# Altium PCB GesturaPCBLayout.PcbDoc (part 2 of 2)
Units mm, origin at the board's own origin, x right, y up, seen from the top; angles counter-clockwise.
Board outline 48.9 x 57.02 mm, 4 copper layers (Top Layer, Ground 1, Ground 2, Bottom Layer), stack 0.603 mm thick; 77 components, 66 nets, 315 pads, 197 vias.
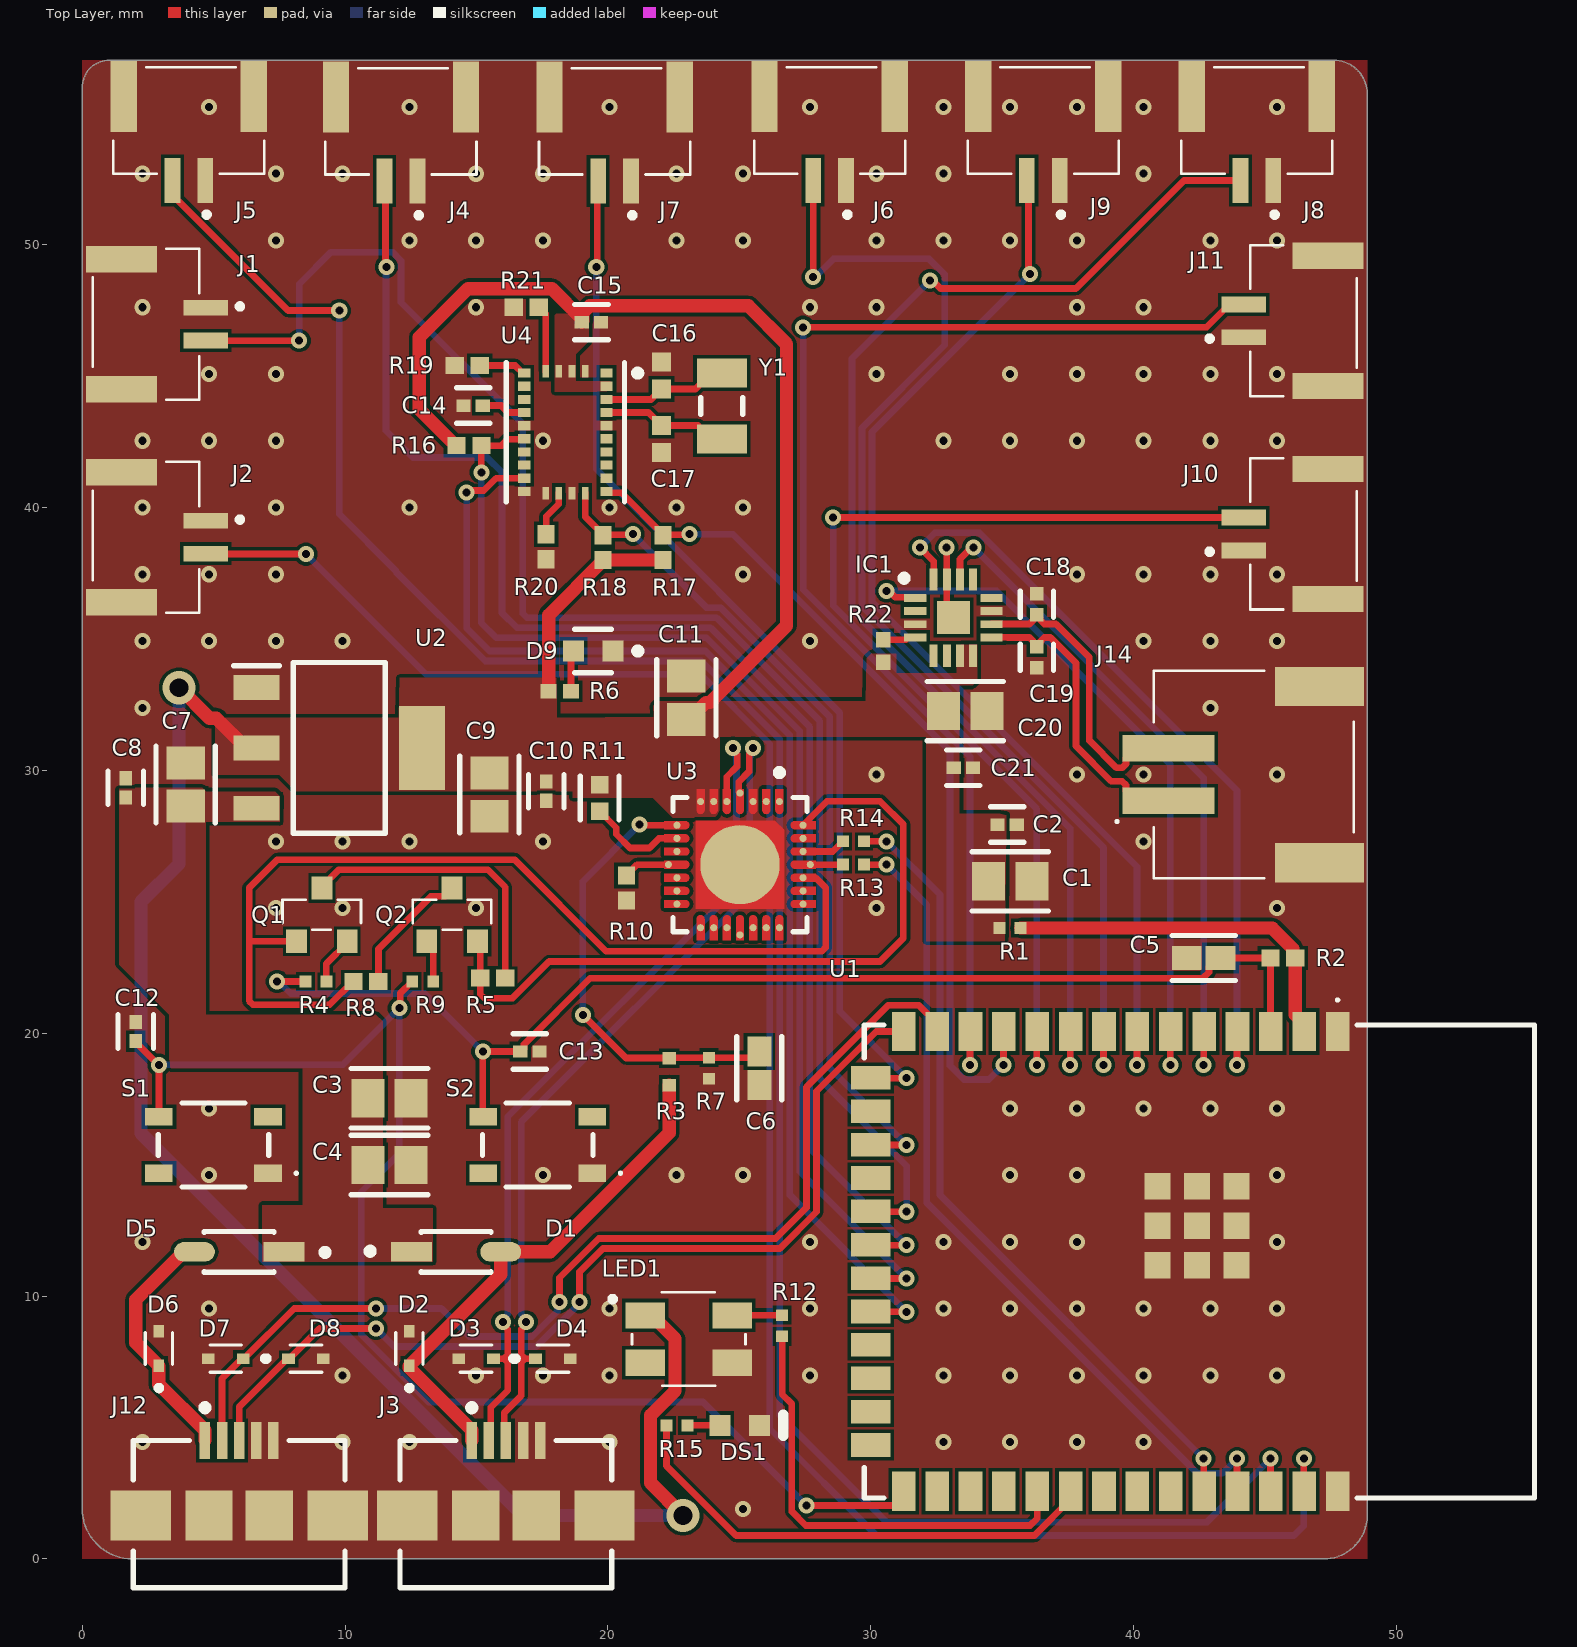
[diagram p0: Top Layer view]

## Via types
v1: diameter 0.61, hole 0.305, Top Layer to Bottom Layer, tented both sides, 195 vias
v2: diameter 1.27, hole 0.711, Top Layer to Bottom Layer, tented both sides, 2 vias

## Nets (pads, with @x,y where several pads share a name; then routed paths per layer and width w, separated by ;. In a path a pad name is that pad's centre, name@x,y a point inside that pad or via, vN(x,y) a via of type N, cw(c..) or ccw(c..) an arc to the next point about the centre after c; other vN are vias at no path point) (continued)
USB_P: (continued)
  Bottom Layer w0.254: v1(16.891,9.017) 16.891,9.113 16.7,9.304 16.7,16.617 25.4,25.317 25.4,30.534 25.459,30.593 25.459,30.793 v1(25.527,30.861)
VBUS: D1.2 D2.1 J3.1 R3.2 | length 19.7
  Top Layer w0.508: J3.1 14.822,4.893 12.446,7.269 D2.1 15.924,10.819 D1.2 17.805,11.684 22.333,16.212 R3.2
VBUSB: D5.2 D6.1 J12.1 | length 9.4
  Top Layer w0.508: D5.2 3.861,11.684 2.032,9.855 2.032,8.225 D6.1 2.916,6.646 4.669,4.893 J12.1
VCC_3V3: C1.1 C2.1 C9.1 C10.1 C11.1 C15.1 C20.1 C21.1 IC1.7 IC1.8 LED1.3 R1.1 R6.2 R11.1 R16.2 R17.2 R18.2 R22.2 U2.2 U2.4 U3.6 U3.7 U4.3 U4.4 U4.28 | length 102.5
  Top Layer w0.508: v2(3.683,33.147) 4.84,31.99 5.1,31.99 6.229,30.861 U2.2 ; R16.2 14.215,42.36 12.827,43.748 12.827,46.482 14.676,48.331 17.874,48.331 18.992,47.213 18.992,47.075 C15.1 19.007,47.061 19.05,47.104 19.05,47.413 19.313,47.676 25.349,47.676 26.797,46.228 26.797,35.508 23.873,32.583 23.731,32.583 23.088,31.94 C11.1 ; R6.2 17.744,35.913 19.812,37.981 R18.2 R17.2 ; LED1.3 21.676,9.262 22.557,8.381 22.557,6.395 21.624,5.463 21.624,2.887 v2(22.86,1.651)
  Bottom Layer w0.508: v2(3.683,33.147) 3.683,26.45 2.235,25.002 2.235,16.195 16.779,1.651 v2(22.86,1.651)
VCC_5V: C3.1 C4.1 C7.1 C8.1 D1.1 D5.1 U2.3
XIN32: C16.1 U4.27 Y1.1 | length 4.8
  Top Layer w0.254: U4.27 21.642,44.118 C16.1 23.334,44.517 23.935,45.118 Y1.1
XOUT32: C17.1 U4.26 Y1.2 | length 4.8
  Top Layer w0.254: U4.26 21.547,43.618 C17.1 23.429,43.124 23.935,42.618 Y1.2
pads on no net: IC1.2 IC1.5 IC1.6 IC1.12 IC1.13 LED1.4 S1.2 S1.3 S2.2 S2.3 U1.28 U1.29 U1.30 U3.1 U3.2 U3.10 U3.12 U3.13 U3.14 U3.15 U3.16 U3.17 U3.18 U3.19 U3.20 U3.21 U3.22 U3.23 U3.27 U4.1 U4.7 U4.8 U4.12 U4.13 U4.21 U4.22 U4.23 U4.24

## Polygon pours and split planes (outlines as drawn)
GND on Top Layer "GND_L01_P007" (solid, pour order 7): 0,57.023 48.895,57.023 48.895,0 0,0
VCC_3V3 on Top Layer "VCC_3V3_L01_P002" (solid, pour order 4): 20.21,44.418 19.685,44.418 17.985,44.418 17.985,47.322 18.034,47.371 19.295,47.371 19.271,47.346 19.271,46.322 18.785,45.836 18.785,44.805 20.21,44.805 20.198,44.793
VCC_3V3 on Top Layer "VCC_3V3_L01_P001" (solid, remove dead copper, pour order 1): 5.065,32.004 12.046,32.02 12.087,33.528 18.034,33.528 18.047,32.012 21.755,32.042 21.717,32.639 24.257,32.639 29.816,32.639 29.854,34.457 30.981,34.432 30.981,33.689 33.269,33.689 33.269,34.798 34.053,34.788 34.057,33.236 33.38,33.236 33.38,28.346 35.17,28.346 35.105,23.508 32.112,23.508 32.112,31.291 24.257,31.291 24.257,28.194 22.479,28.194 21.717,28.956 18.669,28.956 18.669,29.21 8.128,29.21 7.493,29.845 5.065,29.845
VCC_5V on Top Layer "VCC_5V_L01_P003" (solid, pour order 3): 6.858,11.303 13.335,11.303 13.335,13.335 11.43,13.335 11.43,20.447 11.176,20.701 4.699,20.701 4.699,28.048 7.514,28.039 7.522,29.197 4.699,29.21 4.572,29.337 1.401,29.337 1.401,22.602 3.302,20.701 3.302,18.669 8.382,18.669 8.382,13.462 6.858,13.462
GND on Ground 2 "GND_L03_P010" (solid, pour order 10): 48.889,0 0,0 0,57.023 48.895,57.023
GND on Ground 1 "GND_L02_P008" (solid, pour order 8): 0,57.023 48.895,57.023 48.895,0.004 48.891,0 0,0
GND on Bottom Layer "GND_L04_P006" (solid, pour order 6): 0,57.023 48.895,57.023 48.895,0.004 48.89,-0.001 48.889,0 0,0 0,2.032

## Text inside footprints (layer, text, board x,y; h text height)
J3: Mechanical 6 "PCB EDGE" at 7.994,0.028 h0.3
J12: Mechanical 6 "PCB EDGE" at -2.159,0.028 h0.3